# Altium PCB PCB1.PcbDoc
Units mm, origin at the board's own origin, x right, y up, seen from the top; angles counter-clockwise.
Board outline 105.2 x 75.2 mm, 2 copper layers (Top Layer, Bottom Layer), stack 1.671 mm thick; 23 components, 20 nets, 116 pads, 3 vias.
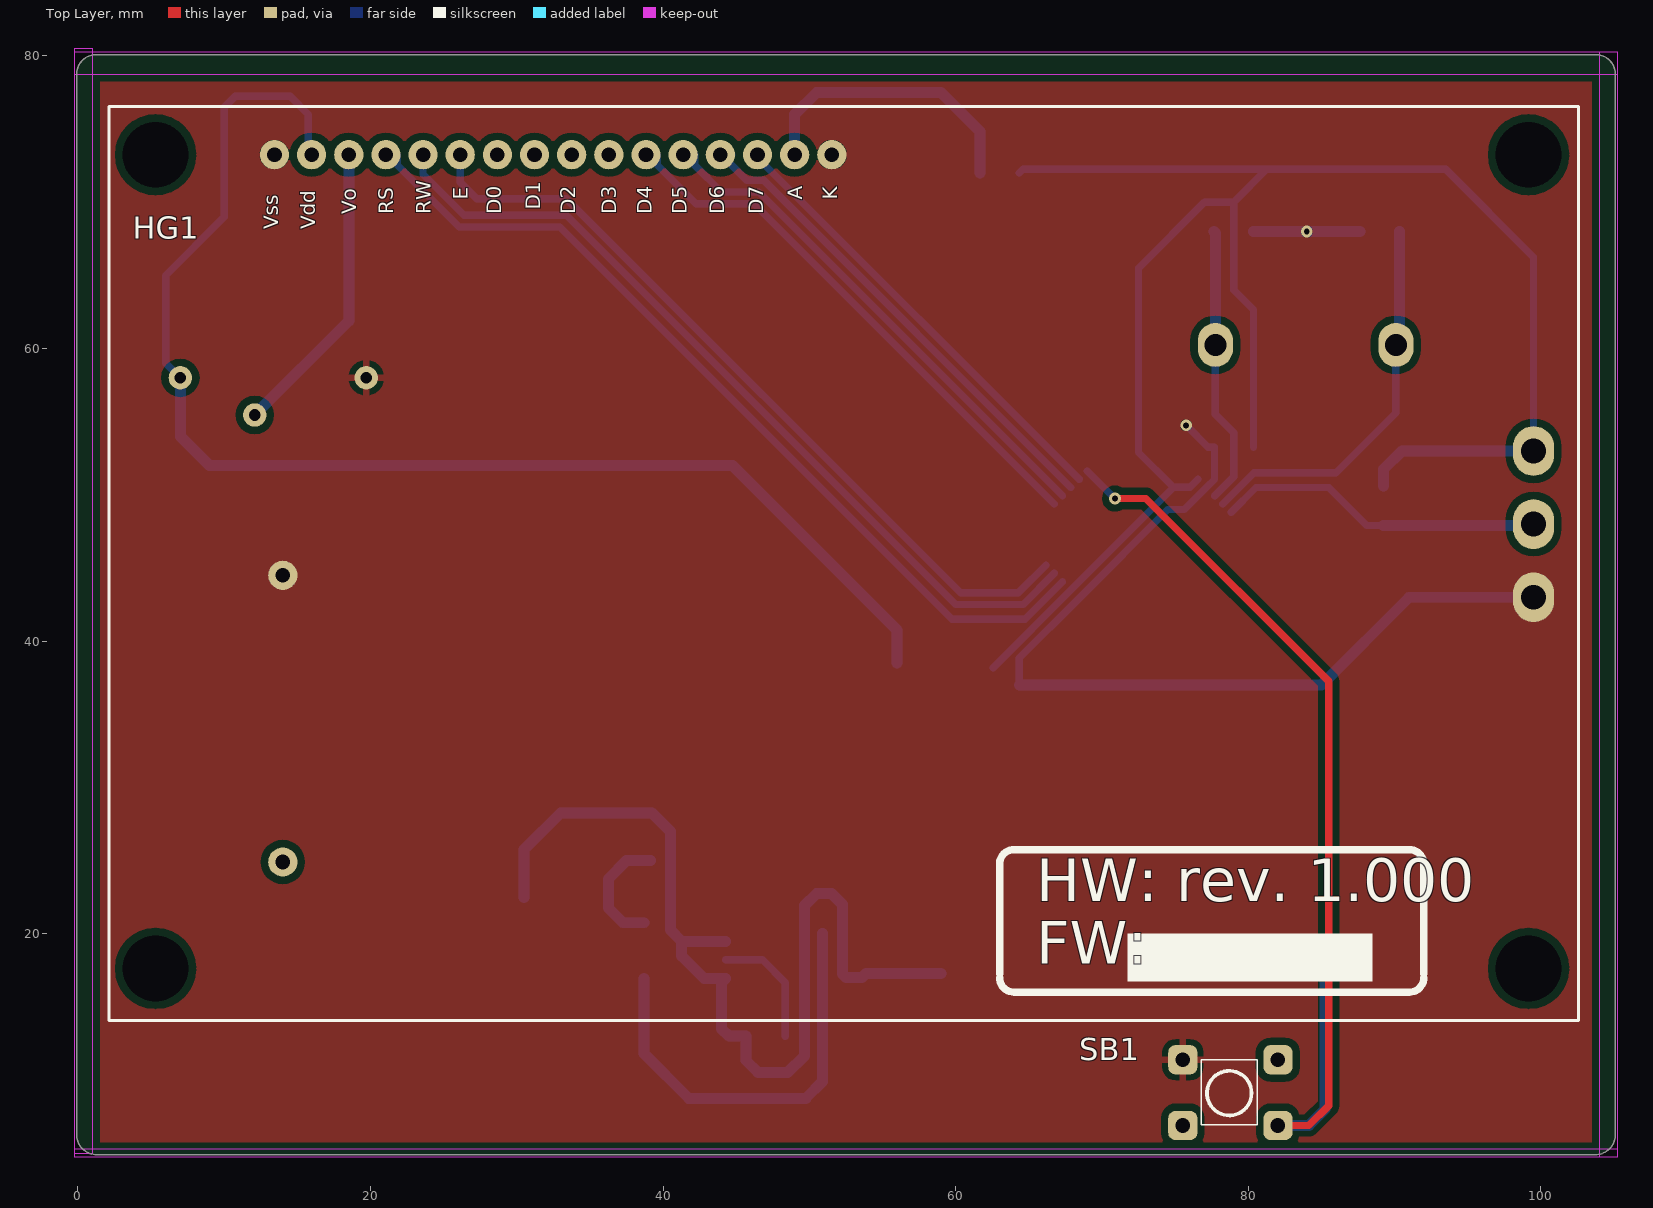
[diagram p0: Top Layer view]
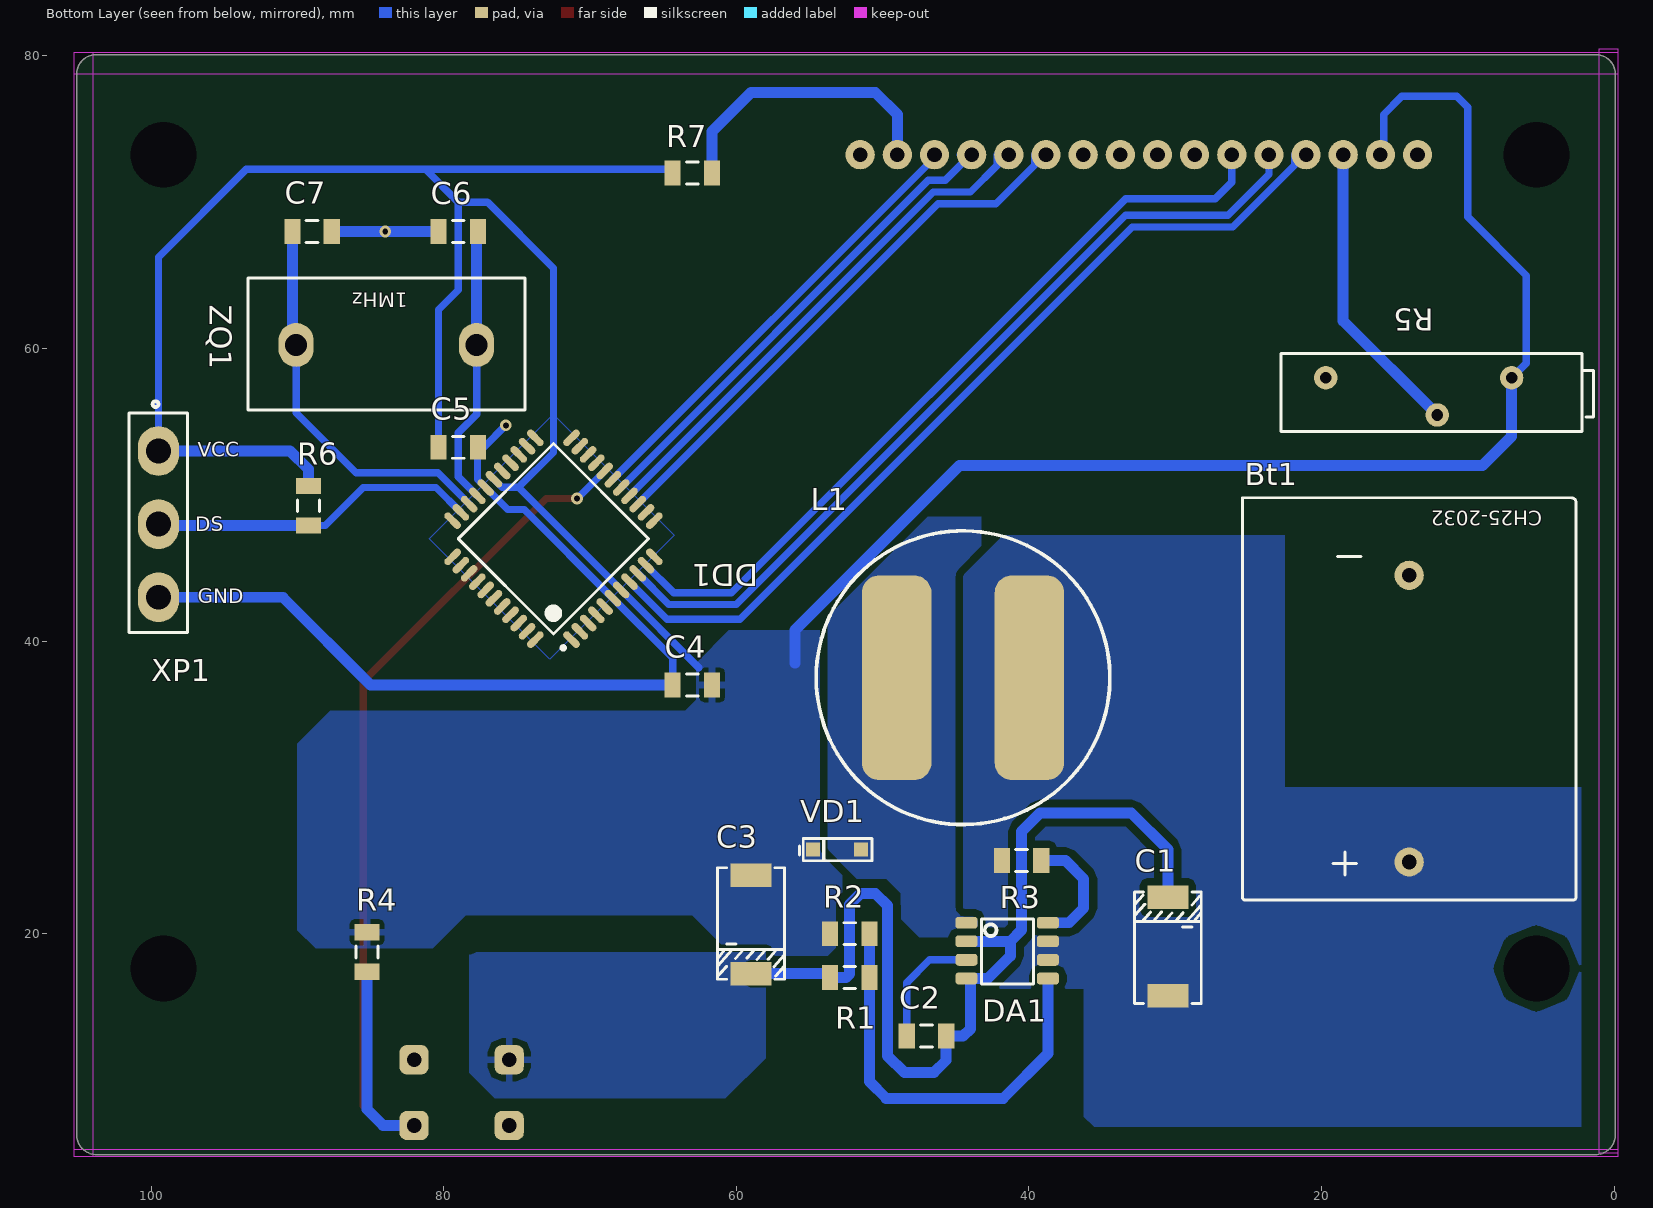
[diagram p1: Bottom Layer view, seen from below]
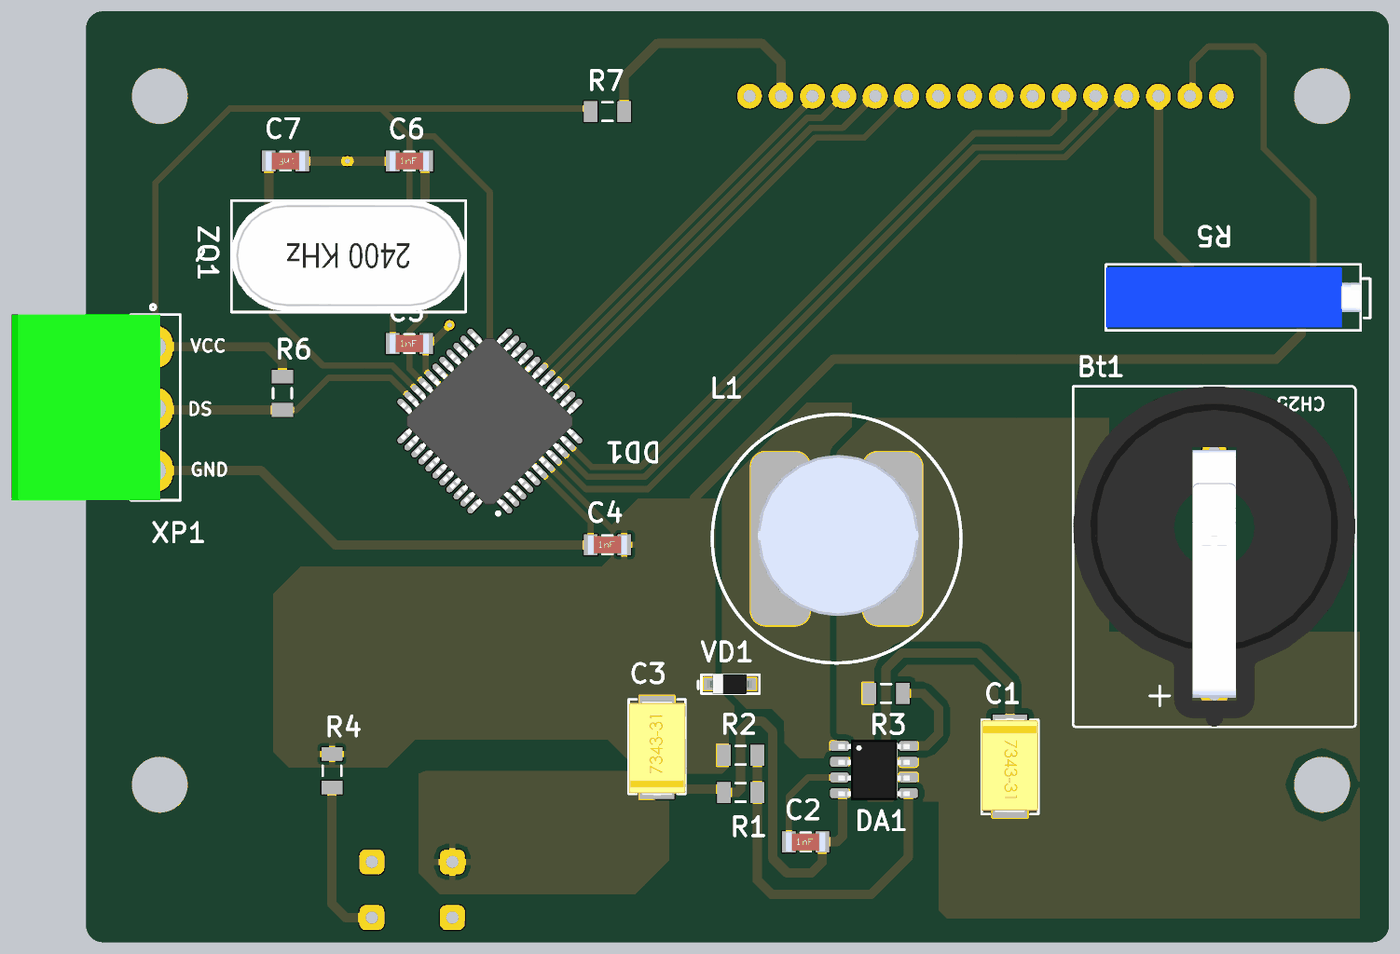
[diagram p2: 3D render of the assembled board from below, using the file's embedded part models]

## Layer stack, top to bottom
Top Solder: solder mask 0.0102, Solder Resist, Dk 3.5
Top Layer: signal copper 0.0356
Dielectric 1: dielectric 1.6, FR-4, Dk 4.8
Bottom Layer: signal copper 0.0356
Bottom Solder: solder mask 0.0102, Solder Resist, Dk 3.5

## Board outline
-0.1,6.27 -0.1,78.73 cw(c1.27,78.73) 1.27,80.1 103.73,80.1 cw(c103.73,78.73) 105.1,78.73 105.1,6.27 cw(c103.73,6.27) 103.73,4.9 1.27,4.9 cw(c1.27,6.27)

## Design rules (kind name [scope] priority, off if disabled: settings)
Clearance [All] p1: gap=0.5 ignorepadtopadclearanceinfootprint=FALSE except(0.25: SMDPad-SMDPad; 0.3: Arc-Arc Arc-Track Arc-SMDPad Track-Track Track-SMDPad; 0.4: Arc-Via Track-Via SMDPad-Via THPad-Via Via-Via)
PlaneClearance [All] p1: clearance=0.6
PlaneConnect PlaneConnect_1 [InNetClass('power')] p1: planeconnectstyle=Relief reliefexpansion=0.4 reliefentries=4 reliefconductorwidth=0.7 reliefairgap=0.4
PlaneConnect [InNetClass('Digit')] p2: planeconnectstyle=Relief reliefexpansion=0.4 reliefentries=4 reliefconductorwidth=0.5 reliefairgap=0.4
PolygonConnect PolygonConnect_Dig [InPadClass('DigitClassConnected')] p1: thpad.connectstyle=Relief thpad.reliefconductorwidth=0.5 thpad.reliefentries=4 thpad.polygonreliefangle="90 Angle" thpad.airgapwidth=0.4 smdpad.connectstyle=Relief smdpad.reliefconductorwidth=0.5 smdpad.reliefentries=4 smdpad.polygonreliefangle="90 Angle" smdpad.airgapwidth=0.3 via.connectstyle=Relief via.reliefconductorwidth=0.5 via.reliefentries=4 via.polygonreliefangle="90 Angle" via.airgapwidth=0.3
PolygonConnect PolygonConnect_PowerClass [InPadClass('PowerClassPad')] p2: connectstyle=Direct reliefconductorwidth=0.254 reliefentries=4 polygonreliefangle="90 Angle" airgapwidth=0.254
RoutingVias [All] p1: holewidth=0.4 width=0.8 viastyle="Through Hole" minholewidth=0.4 minwidth=0.8 maxholewidth=0.4 maxwidth=0.8
SolderMaskExpansion [All] p1: expansion=0.102
Width Width_Power [InNetClass('power')] p1: maxlimit=1 minlimit=0.5 preferedwidth=0.7
Width Width_Dig [InNetClass('Digit')] p2: maxlimit=0.8 minlimit=0.3 preferedwidth=0.4
28 further rules are at their usual default settings.

## Classes and differential pairs
pad class DigitClassConnected: C4-1 C4-2 C5-1 C5-2 C6-1 C6-2 C7-1 C7-2 DD1-1 DD1-2 DD1-3 DD1-4 DD1-5 DD1-6 DD1-7 DD1-8 DD1-9 DD1-10 DD1-11 DD1-12 DD1-13 DD1-14 DD1-15 DD1-16 DD1-17 DD1-18 DD1-19 DD1-20 DD1-21 DD1-22 DD1-23 DD1-24 DD1-25 DD1-26 DD1-27 DD1-28 DD1-29 DD1-30 DD1-31 DD1-32 DD1-33 DD1-34 DD1-35 DD1-36 DD1-37 DD1-38 DD1-39 DD1-40 DD1-41 DD1-42 DD1-43 DD1-44 R4-1 R4-2 R5-1 R5-2 R5-3 R6-1 R6-2 R7-1 R7-2 SB1-1 SB1-2 SB1-3 SB1-4 XP1-2 ZQ1-1 ZQ1-2
pad class PowerClassPad: Bt1-1 Bt1-2 C1-1 C1-2 C2-1 C2-2 C3-1 C3-2 DA1-1 DA1-2 DA1-3 DA1-4 DA1-5 DA1-6 DA1-7 DA1-8 L1-1 L1-2 R1-1 R1-2 R2-1 R2-2 R3-1 R3-2 VD1-1 VD1-2 XP1-1 XP1-3
net class power: +5V GND NetBt1_1 NetC2_1 NetDA1_1 NetDA1_5 NetDA1_8 NetHG1_3 NetHG1_15 RESET
net class Digit: D4 D5 D6 D7 DS E NetBt1_1 NetC6_2 NetC7_2 RS RW
component class StepUpConverter: Bt1 C1 C2 C3 DA1 L1 R1 R2 R3 VD1
component class BlockControl: C4 C5 C6 C7 DD1 HG1 R4 R5 R6 R7 SB1 XP1 ZQ1

## Components (designator, comment, footprint, x,y, rotation, side; value= is the part's Value field where it differs from the comment)
Bt1 "CH-2032" CH25-2032 13.9,38.5 r0 bottom value=CH25-CR2032
C1 "220u" "Type D" 30.5,15.75 r90 bottom
C2 "Capasitor" CAP1206 47,13 r180 bottom value=0.47n
C3 "220u" "Type D" 59,24 r270 bottom
C4 "100nF" CAP1206 63,37 r180 bottom
C5 "100nF" CAP1206 79,53.25 r180 bottom
C6 "27pF" CAP1206 79,68 r180 bottom
C7 "27pF" CAP1206 89,68 r0 bottom
DA1 "MC34063" SO-8 43.5,20.75 r180 bottom value=5V
DD1 "PIC16F877" TQFP80P1200X1200X120-44N 72.5,47 r45 bottom
HG1 "LM044L" LCD2004 13.43,73.25 r0 top
L1 "SDR1307-151KL" SDR1307-151KL 44.5,37.5 r90 bottom value=150u
R1 "Resistor" 1206 52.25,17 r180 bottom value=18k
R2 "Resistor" 1206 52.25,20 r180 bottom value=56k
R3 "Resistor" 1206 40.5,25 r0 bottom value=200
R4 "Resistor" 1206 85.25,18.75 r90 bottom value=1kOm
R5 "10kОм" 3006P 19.7,58 r180 bottom
R6 "4.7kOm" 1206 89.25,49.25 r90 bottom
R7 "100Om" 1206 63,72 r180 bottom
SB1 "Button" KLS2 78.7,9.1 r0 top
VD1 "marka" SOD-23 51.992,25.75 r0 bottom value=1A
XP1 "XY2500R-A-03P" XY2500R-A-03P 99.5,53 r270 bottom value=1000V
ZQ1 "8MHz" HC-51U 77.75,60.25 r0 bottom

## Footprints (in the part's own frame and the unit in brackets; to place one, negate y for a bottom-side part, rotate by r counter-clockwise, add the part's x,y. Pads: shape width x height; smd on the part's side, far side on the other; paste and mask are expansions set on the pad)
1206 [mm]
  rect 1.1x1.7 smd: 1(-1.35,0) 2(1.35,0)
  silkscreen extent -0.4,-0.75 0.4,0.75, body extent -1.55,-0.83 1.55,0.83, height 0.67
3006P [mm]
  round 1.6 hole 0.8: 1(0,0) 2(7.62,-2.54) 3(12.7,0)
  silkscreen extent -3.05,-3.68 18.29,1.65, body extent -3.05,-3.43 17.52,1.4, height 6.85
CAP1206 [mm]
  rect 1.1x1.7 smd: 1(-1.35,0) 2(1.35,0)
  silkscreen extent -0.4,-0.75 0.4,0.75, body extent -1.6,-0.8 1.6,0.8, height 1.25
CH25-2032 [mm]
  round 2 hole 1: 1(0.1,13.6) 2(0.1,-6)
  silkscreen extent -11.3,-11.3 11.5,16.2, body extent -11.3,-11.3 11.5,16.2, height 9.4
HC-51U [mm]
  oval 2.4x3 hole 1.5: 1(0,0) 2(12.34,0)
  silkscreen extent -3.3,-4.57 15.62,4.44, body extent -3.35,-4.61 15.65,4.39, height 20.5
KLS2 [mm]
  rrect50% 2x2 hole 1: 1(-3.175,2.286) 2(3.325,2.286) 3(-3.175,-2.214) 4(3.325,-2.214)
  silkscreen extent -1.91,-2.16 1.9,2.29, body extent -3.12,-3 3.38,3, height 7.5
LCD2004 [mm]
  round 0 hole 4.5: 0(-8.128,-55.626) 0(-8.128,0) 0(85.725,0) 0(85.725,-55.626)
  round 2 hole 1: 1(0,0) 2(2.54,0) 3(5.08,0) 4(7.62,0) 5(10.16,0) 6(12.7,0) 7(15.24,0) 8(17.78,0) 9(20.32,0) 10(22.86,0) 11(25.4,0) 12(27.94,0) 13(30.48,0) 14(33.02,0) 15(35.56,0) 16(38.1,0)
  silkscreen extent -11.3,-59.18 89.15,3.3, body extent -11.34,-59.2 89.16,3.3, height 13.75
SDR1307-151KL [mm]
  rrect50% 14x4.75 smd: 1(0,4.536) 2(0,-4.536)
  silkscreen extent -10.04,-10.04 10.04,10.04, body extent -6.25,-6.63 6.75,6.37, height 7
SO-8 [mm]
  rrect50% 1.505x0.802 smd: 1(-0.762,0) 2(-0.762,-1.27) 3(-0.762,-2.54) 4(-0.762,-3.81) 5(4.8,-3.81) 6(4.8,-2.54) 7(4.8,-1.27) 8(4.8,0)
  silkscreen extent 0.25,-4.19 3.81,0.25, body extent -0.86,-4.39 4.92,0.51, height 1.45
SOD-23 [mm]
  rect 0.95x0.95 smd: 1(-0.508,0) 2(2.758,0)
  silkscreen extent -1.27,-0.76 3.68,0.76, body extent -0.71,-0.8 2.99,0.8, height 1.27
TQFP80P1200X1200X120-44N [mm] "TQFP, 44-Leads, Body 10,00x10,00mm, Pitch 0,80mm, IPC Medium Density"
  oval 1.4x0.5 smd: 1(-5.75,4) 2(-5.75,3.2) 3(-5.75,2.4) 4(-5.75,1.6) 5(-5.75,0.8) 6(-5.75,0) 7(-5.75,-0.8) 8(-5.75,-1.6) 9(-5.75,-2.4) 10(-5.75,-3.2) 11(-5.75,-4) 23(5.75,-4) 24(5.75,-3.2) 25(5.75,-2.4) 26(5.75,-1.6) 27(5.75,-0.8) 28(5.75,0) 29(5.75,0.8) 30(5.75,1.6) 31(5.75,2.4) 32(5.75,3.2) 33(5.75,4)
  oval 0.5x1.4 smd: 12(-4,-5.75) 13(-3.2,-5.75) 14(-2.4,-5.75) 15(-1.6,-5.75) 16(-0.8,-5.75) 17(0,-5.75) 18(0.8,-5.75) 19(1.6,-5.75) 20(2.4,-5.75) 21(3.2,-5.75) 22(4,-5.75) 34(4,5.75) 35(3.2,5.75) 36(2.4,5.75) 37(1.6,5.75) 38(0.8,5.75) 39(0,5.75) 40(-0.8,5.75) 41(-1.6,5.75) 42(-2.4,5.75) 43(-3.2,5.75) 44(-4,5.75)
  silkscreen extent -5.87,-4.6 4.6,4.92, body extent -6,-5.97 6,6.03, height 1.1
"Type D" [mm]
  rect 1.6x2.8 smd: 1(0,0) 2(6.731,0)
  silkscreen extent -0.51,-2.29 7.11,2.29, body extent -0.37,-2.29 7.23,2.31, height 3.1
XY2500R-A-03P [mm]
  oval 3.4x2.8 hole 1.7: 1(0,0) 2(5,0) 3(10,0)
  silkscreen extent -3.4,-2 12.4,2, body extent -2.6,-11.6 12.4,0.4, height 11.57

## Part data
Bt1: library part CR-2032, Manufacturer=Comf, Package=CH25-2032, Part Number=CH25-2032, Price=0.36, Quantity=1, ShoppingPlace=http://belchip.by/product/?selected_product=12241
C1: library part "Capasitor Electrolit", Manufacturer=Kemet, Package=TypeD, Part Namber=T520D227M010ATE018, Power=10V, Price=0.7, Quantity=2, ShoppingPlace=http://belchip.by/product/?selected_product=19189
C2: Manufacturer="FAITHFULL LINK", Package=1206, Part Number=1206471X7R50V, Voltage=50V, Price=0.02, Quantity=1, ShoppingPlace=http://belchip.by/product/?selected_product=00281
C3: library part "Capasitor Electrolit"
C4 C5: library part Capasitor, Manufacturer=Samsung, Package=1206, Part Number=CL31B104KCFNNNE, Voltage=100V, Price=0.205, Quantity=3, ShoppingPlace=http://belchip.by/product/?selected_product=30380
C6: library part Capasitor, Manufacturer="FAITHFULL LINK", Package=1206, Part Number=LFL106270NPO, Voltage=50V, Price=0.025, Quantity=10, ShoppingPlace=http://belchip.by/product/?selected_product=00261
C7: library part Capasitor, Manufacturer="FAITHFULL LINK", Package=1206, Part Number=FL1206270NPO, Voltage=50V, Price=0.025, Quantity=10, ShoppingPlace=http://belchip.by/product/?selected_product=00261
DA1: Manufacturer=UTC, Package=SO8, Part Number=MC34063AG, Price=0.325, Quantity=1, ShoppingPlace=http://belchip.by/product/?selected_product=18919
DD1: Manufacturer=Micchip, Package=TQFP-44, Part Number=PIC16F877A, Price=2.76, Quantity=1, ShoppingPlace=https://ru.aliexpress.com/item/Free-Shipping-5pcs-lot-PIC16F877A-PIC16F877A-I-PT-Microcontrollers-SMD-TQFP-44-new-original/32589109618.html?s=p&ws_ab_test=searchweb0_0,searchweb201602_2_10152_10151_10065_10344_10068_5722815_10342_10343_10340_5722915_10341_5722615_10697_10696_10084_10083_10618_10307_5722715_10059_10534_308_100031_10103_441_10624_10623_10622_5722515_10621_10620,searchweb201603_1,ppcSwitch_5&algo_expid=19ea4dca-365d-404e-8202-e740e16aa93f-5&algo_pvid=19ea4dca-365d-404e-8202-e740e16aa93f&transAbTest=ae803_2&priceBeautifyAB=0
HG1: Manufacturer=HITACHI, Package=16x2.54, Part Number=LM044L-HD44780U, Price=6.36, Quantity=1, ShoppingPlace=https://ru.aliexpress.com/item/LCD-Module-Display-2004-204-HD44780-Yellow-Green-Blacklight-FOR-ARDUINO/32627610997.html?ws_ab_test=searchweb0_0,searchweb201602_2_10152_10151_10065_10344_10068_5722815_10342_10343_10340_5722915_10341_5722615_10697_10696_10084_10083_10618_10307_5722715_10059_10534_308_100031_10103_441_10624_10623_10622_5722515_10621_10620,searchweb201603_1,ppcSwitch_5&algo_expid=81ba670d-1ac6-4fbd-8476-00369042280d-42&algo_pvid=81ba670d-1ac6-4fbd-8476-00369042280d&transAbTest=ae803_2&priceBeautifyAB=0
L1: Manufacturer=BOURNS, Package=SDR1307, Part Number=SDR1307-151KL, Price=0.75, Quantity=1, ShoppingPlace=http://belchip.by/product/?selected_product=06875
R1: Manufacturer=China, Package=1206, Part Number=1206183, Power=0.25W, Price=0.15, Quntity=2, ShoppingPlace=http://belchip.by/product/?selected_product=01413
R2: Manufacturer=china, Package=1206, Part Number=1206563, Power=0.25W, Price=0.15, Quntity=2, ShoppingPlace=http://belchip.by/product/?selected_product=01425
R3: Manufacturer=China, Package=1206, Part Number=SMD12065221, Power=0.25W, Price=1, Quntity=20, ShoppingPlace=http://belchip.by/product/?selected_product=01368
R4: Manufacturer="Royal Ohm", Package=1206, Part Number=SMD1206-1K, Power=0.25W, Price=0.15, Quntity=4, ShoppingPlace=http://belchip.by/product/?selected_product=01384
R5: library part POT, Manufacturer=Bours, Package=3006, Part Number=3006-103-Z-LF, Power=0,125W, Price=0,445, Quantity=1, ShoppingPlace=http://belchip.by/product/?selected_product=32831
R6: library part Resistor, Manufacturer="Royal Ohm", Package=1206, Part Number=SMD1206-1K, Power=0.25W, Price=0.15, Quntity=4, ShoppingPlace=http://belchip.by/product/?selected_product=01399
R7: library part Resistor, Manufacturer=YAGEO, Package=1206, Part Number=RC1206FR-07100RL, Power=0.25W, Price=0.15, Quntity=4, ShoppingPlace=http://belchip.by/product/?selected_product=18520
VD1: library part DiodeShottki, Package=SOD-123, Part Number=1N5819HW, Power=40V, Price=0.12, Quantity=1, ShoppingPlace=http://belchip.by/product/?selected_product=08853
XP1: Manufacturer=RUICHI, Package=XY2500R-A-03P, Part Number=XY2500R-A-03P, Price=0.12, Quantity=1, ShoppingPlace=http://belchip.by/product/?selected_product=31794
ZQ1: library part Rzanator, Manufacturer=CHina, Package=HC-51, Part Number=HC-51, Price=0.255, Quantity=1, ShoppingPlace=http://belchip.by/product/?selected_product=33253

## Via types
v1: diameter 0.8, hole 0.4, Top Layer to Bottom Layer, 3 vias

## Nets (pads, with @x,y where several pads share a name; then routed paths per layer and width w, separated by ;. In a path a pad name is that pad's centre, name@x,y a point inside that pad or via, vN(x,y) a via of type N, cw(c..) or ccw(c..) an arc to the next point about the centre after c; other vN are vias at no path point)
+5V: C3.1 C4.2 C5.1 DD1.7 DD1.28 HG1.2 R2.1 R4.2 R5.3 R6.2 R7.1 VD1.2 XP1.1 | length 217.8
  Bottom Layer w0.5: R5.3 6,59 6,65 10,69 10,76.5 10.75,77.25 14.5,77.25 15.75,76 15.75,73.47 HG1.2 ; 62.559,38.191 DD1.7 74.882,50.513 ; R7.1 64.6,72.25 81.25,72.25 ; DD1.28 76.013,50.513 74.882,50.513 ; C5.1 80.35,62.65 79,64 79,70 ; XP1.1 99.5,66.25 93.5,72.25 81.25,72.25 ; 74.882,50.513 72.5,52.895 72.5,65.5 77,70 79,70 ; 79,70 81.25,72.25
  Bottom Layer w0.75: R5.3 7,54 9,52 44.75,52 56,40.75 56,38.5 ; R6.2 89.25,51.75 90.5,53 XP1.1
D4: DD1.14 HG1.11 | length 38.2
  Bottom Layer w0.5: HG1.11 39.62,73.25 39.62,72.525 42.245,69.9 46.206,69.9 DD1.14
D5: DD1.15 HG1.12 | length 36
  Bottom Layer w0.5: HG1.12 42.16,73.25 42.16,72.525 43.985,70.7 46.537,70.7 DD1.15
D6: DD1.16 HG1.13 | length 33.1
  Bottom Layer w0.5: HG1.13 HG1.13@44.7,73.25 ; 44.7,72.525 45.725,71.5 46.869,71.5 DD1.16
D7: DD1.17 HG1.14 | length 31.3
  Bottom Layer w0.5: HG1.14 46.45,73.05 DD1.17
DS: DD1.32 R6.1 XP1.2 | length 22.5
  Bottom Layer w0.5: DD1.32 80.525,50.5 85.5,50.5 88.1,47.9 R6.1
  Bottom Layer w0.75: R6.1 99.4,47.9 XP1.2
E: DD1.10 HG1.6 | length 54.3
  Bottom Layer w0.5: HG1.6 26.13,71.37 27.25,70.25 33.381,70.25 60.331,43.3 64.275,43.3 DD1.10
GND: Bt1.2 C1.2 C2.2 C3.2 C4.1 C5.2 C6.1 C7.1 DA1.2 DA1.4 DD1.6 DD1.29 HG1.1 HG1.16 R1.1 R5.1 SB1.1 XP1.3 | length 137.3
  Bottom Layer w0.5: C4.1 64.35,38.85 DD1.6 74.5,49 75.631,49 DD1.29 77.684,51.053 77.684,53.25 C5.2 77.25,53.25 v1(75.75,54.75)
  Bottom Layer w0.75: C1.2 30.5,25.75 33,28.25 39.25,28.25 40.5,27 40.5,20.25 41.27,19.48 ; DA1.2 41.27,19.48 ; C3.2 53.869,17.269 R1.1 52.5,17 52.25,17.25 52.25,22 51.5,22.75 50.5,22.75 49.675,21.925 49.675,20.543 49.65,20.518 49.65,11.65 48.5,10.5 46.5,10.5 45.65,11.35 C2.2 44.5,13 44,13.5 44,16.678 DA1.4 42.81,16.94 41.27,18.48 41.27,19.48 ; C4.1 85,37 91,43 XP1.3 ; C6.1 v1(84,68) C7.1
NetBt1_1: Bt1.1 C1.1 DA1.6 DA1.7 L1.2 R3.2
NetC2_1: C2.1 DA1.3 | length 8.4
  Bottom Layer w0.5: DA1.3 46.79,18.21 48.35,16.65 C2.1
NetC6_2: C6.2 DD1.30 ZQ1.1 | length 19.2
  Bottom Layer w0.5: DD1.30 79,51.237 79,54.25 77.75,55.5 ZQ1.1
  Bottom Layer w0.75: C6.2 77.75,67.9 ZQ1.1
NetC7_2: C7.2 DD1.31 ZQ1.2 | length 26.9
  Bottom Layer w0.5: DD1.31 80.394,51.5 86,51.5 90.09,55.59 ZQ1.2
  Bottom Layer w0.75: ZQ1.2 90.35,60.51 C7.2
NetDA1_1: DA1.1 L1.1 VD1.1
NetDA1_5: DA1.5 R1.2 R2.2 | length 29.2
  Bottom Layer w0.75: DA1.5 38.7,11.8 41.75,8.75 49.75,8.75 50.9,9.9 R1.2 R2.2
NetDA1_8: DA1.8 R3.1 | length 8.3
  Bottom Layer w0.75: DA1.8 37.25,20.75 36.25,21.75 36.25,23.75 37.5,25 R3.1
NetHG1_3: HG1.3 R5.2 | length 20.5
  Bottom Layer w0.75: R5.2 18.51,61.89 HG1.3
NetHG1_15: HG1.15 R7.2 | length 20
  Bottom Layer w0.75: HG1.15 48.99,75.99 50.5,77.5 59,77.5 61.65,74.85 R7.2
RESET: DD1.18 R4.1 SB1.4 | length 68.6
  Top Layer w0.5: v1(70.881,49.75) 73,49.75 85.5,37.25 85.5,8.25 84.136,6.886 SB1.4
  Bottom Layer w0.5: DD1.18 v1(70.881,49.75)
  Bottom Layer w0.75: SB1.4 84.136,6.886 85.25,8 R4.1
RS: DD1.8 HG1.4 | length 60.9
  Bottom Layer w0.5: HG1.4 21.84,73.25 21.84,72.525 26.058,68.308 32.942,68.308 59.75,41.5 64.737,41.5 DD1.8
RW: DD1.9 HG1.5 | length 57.6
  Bottom Layer w0.5: HG1.5 23.59,71.91 26.392,69.108 33.392,69.108 60,42.5 64.606,42.5 DD1.9
pads on no net: DD1.1 DD1.2 DD1.3 DD1.4 DD1.5 DD1.11 DD1.12 DD1.13 DD1.19 DD1.20 DD1.21 DD1.22 DD1.23 DD1.24 DD1.25 DD1.26 DD1.27 DD1.33 DD1.34 DD1.35 DD1.36 DD1.37 DD1.38 DD1.39 DD1.40 DD1.41 DD1.42 DD1.43 DD1.44 HG1.0 HG1.7 HG1.8 HG1.9 HG1.10 SB1.2 SB1.3

## Polygon pours and split planes (outlines as drawn)
NetBt1_1 on Bottom Layer "Top Overlay-No Net" (solid, remove dead copper, pour order 0): 2.25,30 2.25,6.25 35,6.25 36.25,7.5 36.25,16.75 35.5,17.5 23.75,17.5 22.5,18.75 22.5,30
NetBt1_1 on Bottom Layer "Top Overlay-No Net" (solid, remove dead copper, pour order 2): 40,19.75 40,18 37.5,18 36.25,16.75 36.25,16.25 35,17.5 35,19.75
NetBt1_1 on Bottom Layer "Top Overlay-No Net" (solid, remove dead copper, pour order 4): 44.5,44.5 41.75,47.25 22.5,47.25 22.5,18.25 24.5,16.25 44.5,16.25
GND on Bottom Layer "Top Overlay-No Net" (solid, remove dead copper, pour order 8): 58,18.75 58,11.5 60.75,8.75 76.5,8.75 78.25,10.5 78.25,18.75
NetDA1_1 on Bottom Layer "Top Overlay-No Net" (solid, remove dead copper, pour order 6): 43.25,19.75 47.5,19.75 48.75,21 48.75,22.75 49.75,23.75 51.75,23.75 53.75,25.75 53.75,46 51.25,48.5 43.25,48.5
+5V on Bottom Layer "Top Overlay-No Net" (solid, remove dead copper, pour order 12): 52.75,19.5 53.75,18.5 60.25,18.5 63,21.25 78.5,21.25 80.75,19 88.75,19 90,20.25 90,33 87.75,35.25 63.5,35.25 62.75,36 62.75,38.5 60.5,40.75 52.75,40.75
GND on Bottom Layer "Top Overlay-No Net" (solid, remove dead copper, pour order 14): 64.25,47.25 72.75,38.75 81,47 72.5,55.5
GND on Top Layer "Top Layer-No Net" (solid, pour order 16): -0.1,6.27 -0.1,78.73 cw(c1.27,78.73) 1.27,80.1 103.73,80.1 cw(c103.73,78.73) 105.1,78.73 105.1,6.27 cw(c103.73,6.27) 103.73,4.9 1.27,4.9 cw(c1.27,6.27)

## Keep-outs
Keep-Out Layer:
  rectangle: -0.25,78.75 105.25,80.25
  rectangle: 104,4.75 105.25,80.25
  rectangle: -0.25,5 1,80.5
  rectangle: -0.25,4.75 105.25,5.25

## Silkscreen, mask and mechanical layers (free items; w line width, h text height)
Top Overlay:
  rectangle: 71.75,16.75 88.5,20
  lines w0.5: 63,17 ccw(c64,17) 64,16 91,16 ccw(c91,17) 92,17 ; 63,17.25 63,25 ; 63,24.75 cw(c64,24.75) 64,25.75 91,25.75 cw(c91,24.75) 92,24.75 92,17.25
  text "HW: rev. 1.000" at 65.5,21.25 h5
  text "FW:" at 65.5,17 h5
Board:
  lines w0.2: 4.9,80 102.5,80 103.73,80 cw(c103.73,78.73) 105,78.73 105,77.5 105,75.5 105,12.5 105,11.27 105,7.5 105,6.27 cw(c103.73,6.27) 103.73,5 102.5,5 2.5,5 1.27,5 cw(c1.27,6.27) 0,6.27 0,7.5 0,11.27 0,12.5 0,77.5 0,78.73 cw(c1.27,78.73) 1.27,80 5,80

## Text inside footprints (layer, text, board x,y; h text height)
Bt1: Bottom Overlay "CH25-2032" at 4.9,48.9 h1 r180
HG1: Top Overlay "K" at 51.911,70.169 h1 r90; Top Overlay "A" at 49.498,70.169 h1 r90; Top Overlay "D7" at 46.831,69.17 h1 r90; Top Overlay "D6" at 44.164,69.17 h1 r90; Top Overlay "D5" at 41.624,69.17 h1 r90; Top Overlay "D4" at 39.211,69.17 h1 r90; Top Overlay "D3" at 36.798,69.17 h1 r90; Top Overlay "D2" at 34.004,69.17 h1 r90; Top Overlay "D1" at 31.591,69.503 h1 r90; Top Overlay "D0" at 28.924,69.17 h1 r90; Top Overlay "E" at 26.638,70.169 h1 r90; Top Overlay "RW" at 24.098,69.17 h1 r90; Top Overlay "RS" at 21.558,69.17 h1 r90; Top Overlay "Vo" at 19.018,69.17 h1 r90; Top Overlay "Vdd" at 16.224,68.17 h1 r90; Top Overlay "Vss" at 13.684,68.17 h1 r90
XP1: Bottom Overlay "VCC" at 96.8,52.6 h1; Bottom Overlay "GND" at 96.8,42.6 h1; Bottom Overlay "DS" at 97,47.5 h1
ZQ1: Bottom Overlay "1MHz" at 82.449,63.806 h1 r180